# Altium PCB Receiver.PcbDoc
Units mm, origin at the board's own origin, x right, y up, seen from the top; angles counter-clockwise.
Board outline 64.8 x 68.17 mm, 2 copper layers (Top Layer, Bottom Layer); 36 components, 18 nets, 93 pads, 163 vias.
Unrouted connection lines stored in the file: 18.
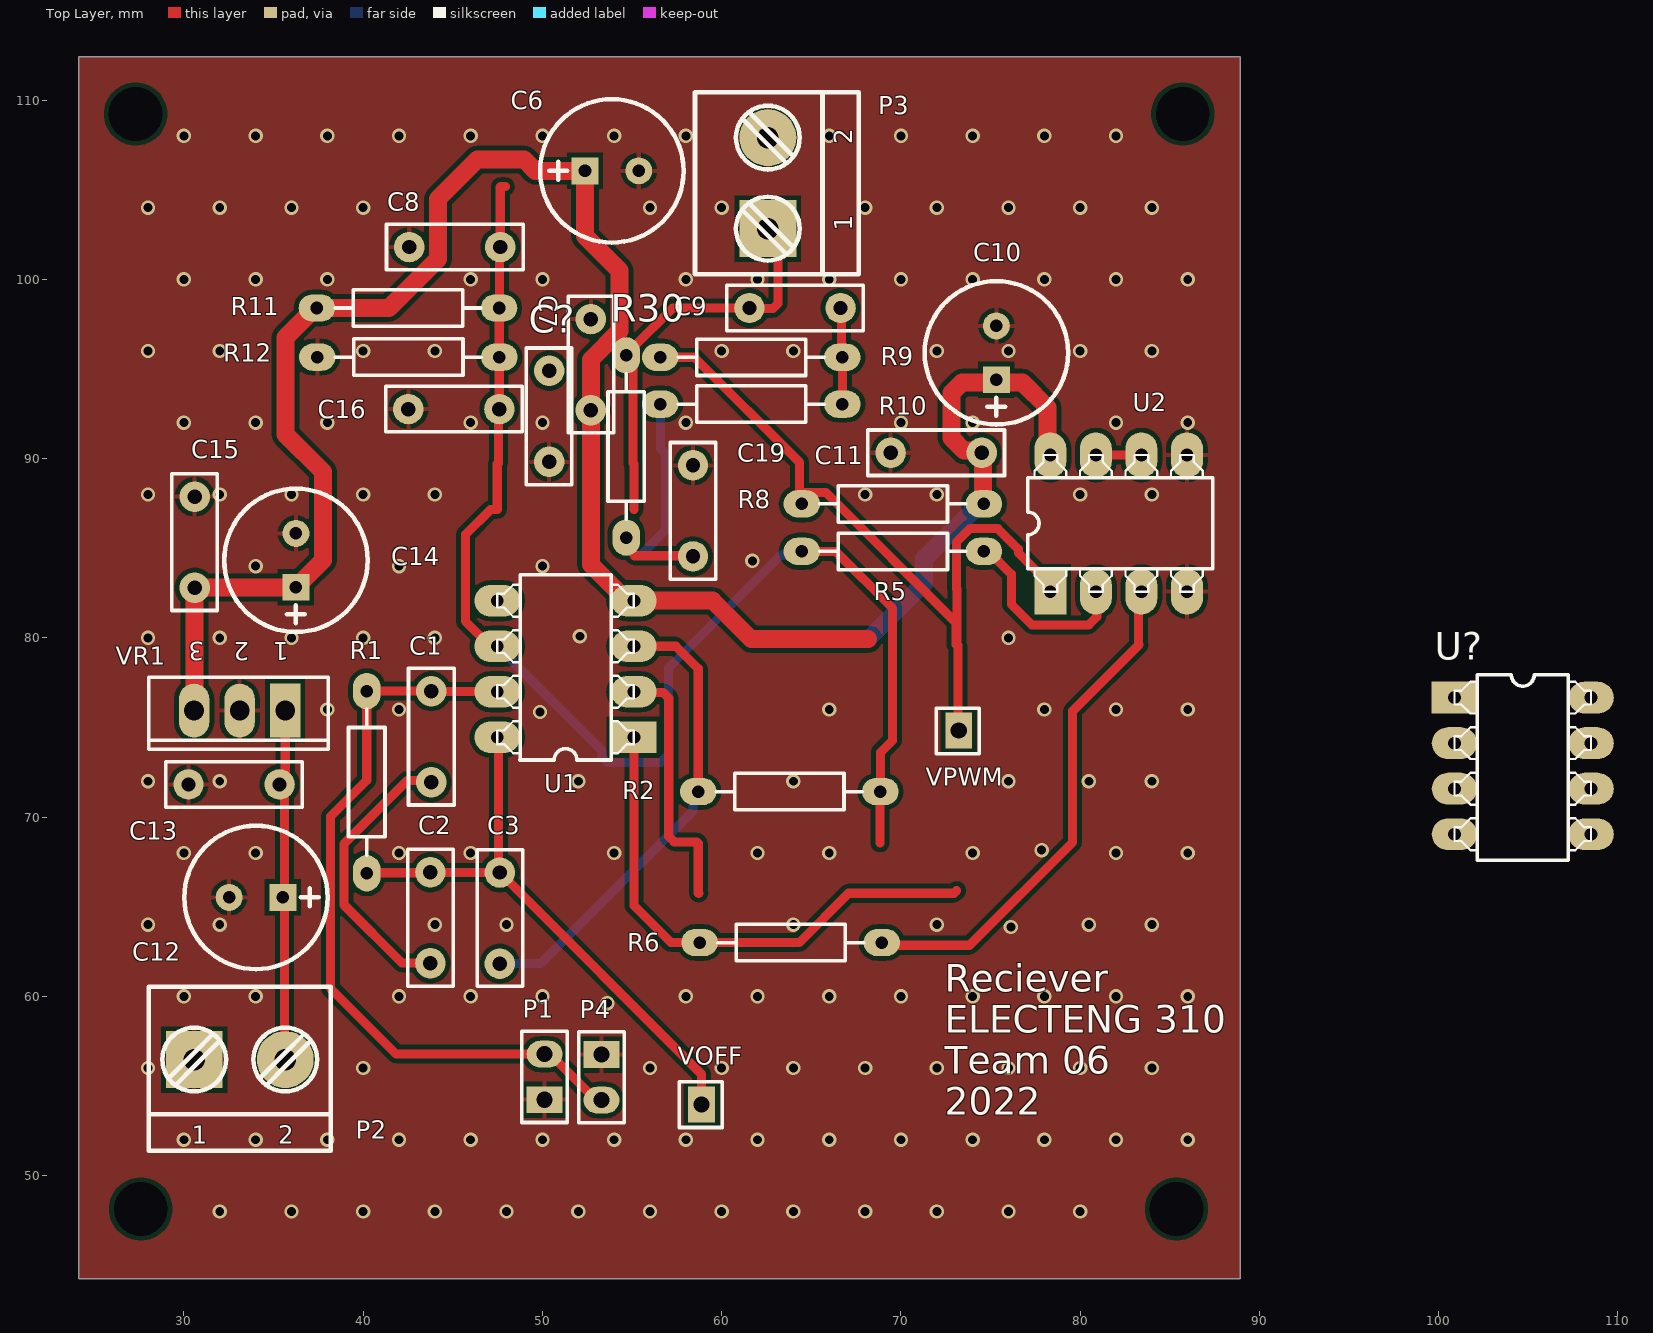
[diagram p0: Top Layer view]
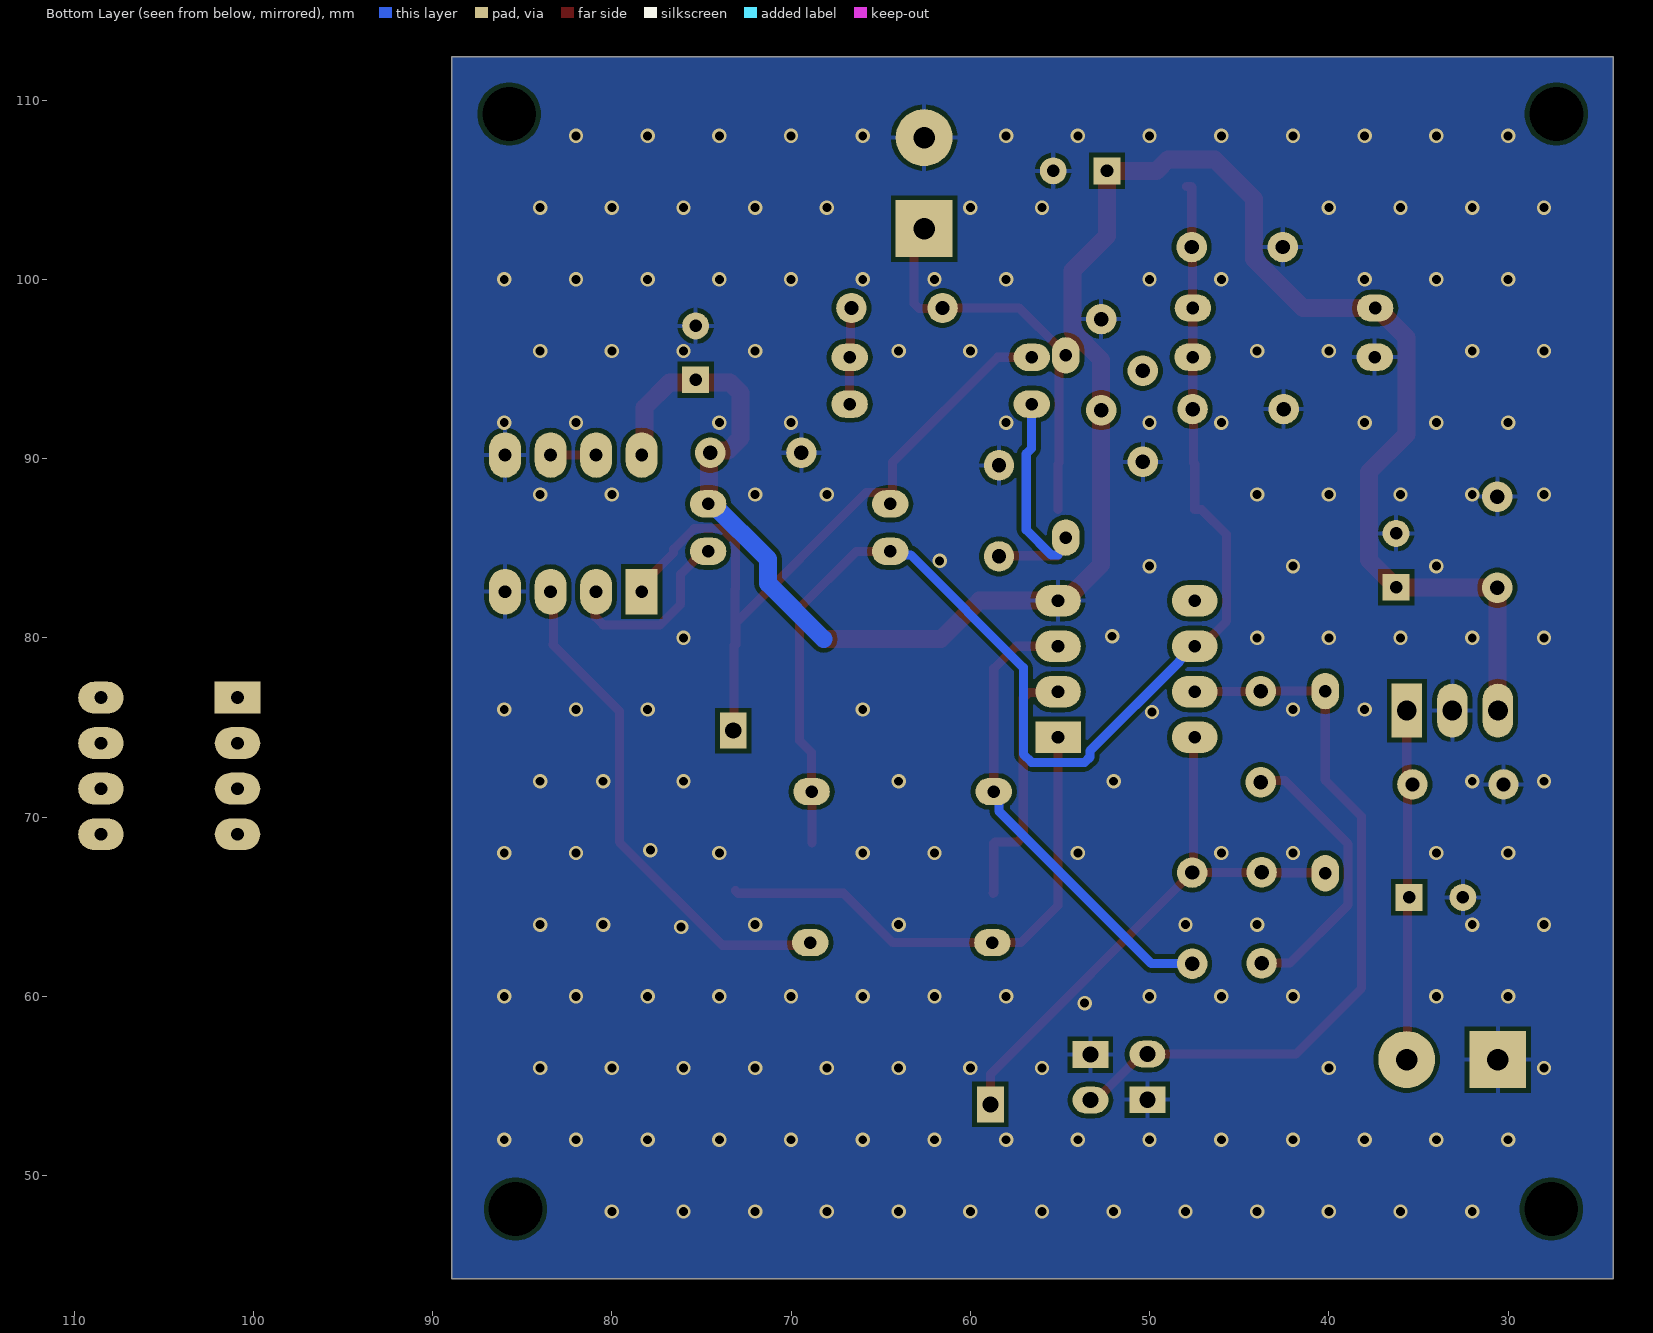
[diagram p1: Bottom Layer view, seen from below]

## Layer stack, top to bottom
Top Solder: solder mask 0.0102, Solder Resist, Dk 3.5
Top Layer: signal copper 0.0356
Dielectric 1: dielectric 0.32, FR-4, Dk 4.8
Bottom Layer: signal copper 0.0356
Bottom Solder: solder mask 0.0102, Solder Resist, Dk 3.5

## Board outline
24.125,44.25 24.125,112.425 88.925,112.425 88.925,44.25

## Design rules (kind name [scope] priority, off if disabled: settings)
Clearance [All] p1: gap=0.254 ignorepadtopadclearanceinfootprint=FALSE except(0: Arc-Hole Track-Hole SMDPad-Hole THPad-Hole Via-Hole Fill-Hole Poly-Hole Region-Hole Text-Hole)
MinimumSolderMaskSliver [All] p1: minsoldermaskwidth=0.1
PolygonConnect [All] p1: thpad.connectstyle=Relief thpad.reliefconductorwidth=0.254 thpad.reliefentries=4 thpad.polygonreliefangle="90 Angle" thpad.airgapwidth=0.254 smdpad.connectstyle=Relief smdpad.reliefconductorwidth=0.254 smdpad.reliefentries=4 smdpad.polygonreliefangle="90 Angle" smdpad.airgapwidth=0.254 via.connectstyle=Direct via.reliefconductorwidth=0.254 via.reliefentries=4 via.polygonreliefangle="90 Angle" via.airgapwidth=0.254
RoomDefinition Regulator [InComponentClass('Regulator')] p1: confinementstyle=ConfineIn formatcopy=TRUE lockcomponents=FALSE outline 0,0 50.8,0 50.8,25.4 0,25.4
RoomDefinition "Light Detector" [InComponentClass('Light Detector')] p2: confinementstyle=ConfineIn formatcopy=TRUE lockcomponents=FALSE outline 0,0 50.8,0 50.8,25.4 0,25.4
RoomDefinition "PWM Regenerator" [InComponentClass('PWM Regenerator')] p3: confinementstyle=ConfineIn formatcopy=TRUE lockcomponents=FALSE outline 0,0 50.8,0 50.8,25.4 0,25.4
RoomDefinition "LP Filter" [InComponentClass('LP Filter')] p4: confinementstyle=ConfineIn formatcopy=TRUE lockcomponents=FALSE outline 0,0 50.8,0 50.8,25.4 0,25.4
RoomDefinition "HP Filter" [InComponentClass('HP Filter')] p5: confinementstyle=ConfineIn formatcopy=TRUE lockcomponents=FALSE outline 0,0 50.8,0 50.8,25.4 0,25.4
RoutingVias [All] p1: holewidth=0.711 width=1.27 viastyle="Through Hole" minholewidth=0.711 minwidth=1.27 maxholewidth=0.711 maxwidth=1.27
SilkToSilkClearance [All] p1: silktosilkclearance=0.1
SilkToSolderMaskClearance [IsPad] p1: minsilkscreentomaskgap=0.1 clearancetoexposedcopper=TRUE
SolderMaskExpansion [All] p1: expansion=0.102 istentingtop=FALSE
Width [All] p1: maxlimit=1.016 minlimit=0.254 preferedwidth=0.508
27 further rules are at their usual default settings.

## Classes and differential pairs
component class "LP Filter": C9 C10 C11 C19 C? P3 R9 R10 R30 U?
component class Regulator: C12 C13 C14 C15 C16 C? J? P2 R11 R12 VR1
component class "PWM Regenerator": C6 C7 C8 C? J? R5 R6 R8 U2 VPWM
component class "Light Detector": C1 C2 C? J? P1 P4 R1 tm U1 VOFF
component class "HP Filter": C3 C? R2

## Components (designator, comment, footprint, x,y, rotation, side; value= is the part's Value field where it differs from the comment)
C1 "15p" ece-RAD0.2 43.8,77.025 r270 top
C2 "15p" ece-RAD0.2 43.75,61.845 r90 top
C3 "27n" ece-RAD0.2 47.625,66.905 r270 top
C6 "10uF" ece-CAPAD2TH0.3 52.375,106.05 r0 top
C7 "100 nF" ece-RAD0.2 52.7,92.7 r90 top
C8 "100 nF" ece-RAD0.2 47.65,101.8 r180 top
C9 "10 nF" ece-RAD0.2 66.63,98.4 r180 top
C10 "10uF" ece-CAPAD2TH0.3 75.325,94.4 r90 top
C11 "100 nF" ece-RAD0.2 74.505,90.325 r180 top
C12 "22uF" ece-CAPAD2TH0.3 35.521,65.518 r180 top
C13 "330 nF" ece-RAD0.2 35.336,71.822 r180 top
C14 "10uF" ece-CAPAD2TH0.3 36.25,82.825 r90 top
C15 "100 nF" ece-RAD0.2 30.6,82.795 r90 top
C16 "100 nF" ece-RAD0.2 47.599,92.76 r180 top
C19 "100 nF" ece-RAD0.2 58.4,84.545 r90 top
C? "10 nF" ece-RAD0.2 50.375,94.9 r270 top
P1 "Header 2" ece-HDR1X2 50.125,54.235 r90 top
P2 "Connector2way" ece-TER-2.02 30.575,56.475 r90 top
P3 "Connector2way" ece-TER-2.02 62.575,102.825 r180 top
P4 "Header 2" ece-HDR1X2 53.298,56.752 r270 top
R1 "100k" ece-AXIAL0.4 40.2,71.95 r270 top
R2 "10k" ece-AXIAL0.4 63.775,71.425 r180 top
R5 "1k" ece-AXIAL0.4 69.55,84.825 r0 top
R6 "1k" ece-AXIAL0.4 63.85,63 r0 top
R8 "1k" ece-AXIAL0.4 69.55,87.475 r0 top
R9 "100k" ece-AXIAL0.4 61.65,95.65 r0 top
R10 "10k" ece-AXIAL0.4 61.652,93.038 r180 top
R11 "10k" ece-AXIAL0.4 42.5,98.4 r180 top
R12 "10k" ece-AXIAL0.4 42.521,95.66 r0 top
R30 "4.7k" ece-AXIAL0.4 54.675,90.675 r90 top
U1 "TLC082" ECE-DIP8 55.102,74.452 r180 top
U2 "LM393AN" ECE-DIP8 78.335,82.575 r90 top
U? "TLC082" ECE-DIP8 100.88,76.665 r0 top
VOFF "Vdet" ece-HDR1 58.875,53.975 r0 top
VPWM "VPWM" ece-HDR1 73.225,74.825 r0 top
VR1 "*" ece-TO220 37.048,77.793 r180 top

## Footprints (in the part's own frame and the unit in brackets; to place one, negate y for a bottom-side part, rotate by r counter-clockwise, add the part's x,y. Pads: shape width x height; smd on the part's side, far side on the other; paste and mask are expansions set on the pad)
ece-AXIAL0.4 [mil]
  oval 80x60 hole 27.56: 1(-200,0) 2(200,0)
  silkscreen extent -160,-40 160,40
ece-CAPAD2TH0.3 [mm]
  rect 1.5x1.5 hole 0.7: 1(0,0)
  round 1.5 hole 0.7: 2(3,0)
  silkscreen extent -2.5,-4 5.5,4
ECE-DIP8 [mil]
  rect 100x70 hole 28: 1(0,0)
  oval 100x70 hole 28: 2(0,-100) 3(0,-200) 4(0,-300) 5(300,-300) 6(300,-200) 7(300,-100) 8(300,0)
  silkscreen extent 0,-357 300,50
ece-HDR1 [mm]
  rect 1.5x2 hole 0.9: 1(0,0)
  silkscreen extent -1.25,-1.29 1.15,1.25
ece-HDR1X2 [mm] "Header 2 way"
  rect 1.5x2 hole 0.9: 1(0,0)
  oval 1.5x2 hole 0.9: 2(2.54,0)
  silkscreen extent -1.27,-1.27 3.81,1.27
ece-RAD0.2 [mm]
  round 1.7 hole 0.8: 1(0,0) 2(5.08,0)
  silkscreen extent -1.27,-1.27 6.35,1.27
ece-TER-2.02 [mm]
  rect 3.175x3.175 hole 1.2: 1(0,0)
  round 3.175 hole 1.2: 2(0,-5.08)
  silkscreen extent -5.08,-7.62 4.06,2.54
ece-TO220 [mm]
  rect 1.7x3 hole 1.1: 1(1.4,1.85)
  oval 1.7x3 hole 1.1: 2(3.94,1.85) 3(6.48,1.85)
  silkscreen extent -1,0 9,4

## Part data
C1 C2 C3 C7 C8 C9 C11 C13 C15 C16 C19 C?: library part CAP, "Capacitor Non Polarised Through Hole"
C6 C10 C12 C14: library part "CAP 22uF TH", "Polarized Capacitor (Radial)", Manufacturer="Generic Components", Class I=Passive, Class II=Capacitor, Published=8-Jun-2000, Publisher="Altium Limited", Revision="July-2002: Re-released for DXP Platform."
P1 P4: "Header, 2-Pin", LatestRevisionDate=17-Jul-2002, LatestRevisionNote="Re-released for DXP Platform.", Publisher="Altium Limited"
P2 P3: "2 way screw connector"
R1 R2 R5 R6 R8 R9 R10 R11 R12 R30: library part Res1, "Resistor", LatestRevisionDate=17-Jul-2002, LatestRevisionNote="Re-released for DXP Platform.", PackageReference=AXIAL-0.3, Published=8-Jun-2000, Publisher="Altium Limited"
U2: "Dual Comparator", ComponentLink1Description="Manufacturer Link", ComponentLink1URL=http://www.onsemi.com/site/products/taxonomy/0,4438,133,00.html, DatasheetVersion=1988, LatestRevisionDate=06-Jun-2005, LatestRevisionNote="Stylized 3D Model Added.", PackageDescription="DIP; 8 Leads; Row Spacing 7.62 mm; Pitch 2.54 mm", PackageReference=626-05, Published=17-Jul-2002, Publisher="Altium Limited"
VOFF VPWM: library part "Test pin", "Socket", LatestRevisionDate=17-Jul-2002, LatestRevisionNote="Re-released for DXP Platform.", Publisher="Altium Limited"
VR1: library part VoltRegBig, "Voltage Regulator"

## Free pads (board coordinates)
  round 0 hole 3 unplated mask+0: 2(27.59,48.14) 3(85.375,48.14) 4(85.725,109.22) 5(27.305,109.22)

## Via types
v1: diameter 0.8, hole 0.5, Top Layer to Bottom Layer, 163 vias

## Nets (pads, with @x,y where several pads share a name; then routed paths per layer and width w, separated by ;. In a path a pad name is that pad's centre, name@x,y a point inside that pad or via, vN(x,y) a via of type N, cw(c..) or ccw(c..) an arc to the next point about the centre after c; other vN are vias at no path point)
GND: C6.2 C7.2 C8.2 C10.2 C11.2 C12.2 C13.2 C14.2 C15.2 C16.2 C19.2 C?.2 P1.1 P2.1 P3.2 P4.1 R12.1 U1.4 U2.4 U2.5 U?.4 VR1.2
  other v1: 32,48 36,48 40,48 44,48 48,48 52,48 56,48 60,48 64,48 68,48 72,48 76,48 80,48 30,52 34,52 38,52 42,52 46,52 50,52 54,52 58,52 62,52 66,52 70,52 74,52 78,52 82,52 86,52 28,56 40,56 56,56 60,56 64,56 68,56 72,56 76,56 80,56 84,56 53.623,59.623 30,60 34,60 42,60 46,60 50,60 58,60 62,60 66,60 70,60 74,60 78,60 82,60 86,60 76.13,63.87 28,64 32,64 44,64 48,64 64,64 72,64 80.483,64 84,64 30,68 34,68 42,68 46,68 54,68 62,68 66,68 74,68 82,68 86,68 77.845,68.155 28,72 32,72 52,72 64,72 76,72 80.483,72 84,72 49.865,75.865 38,76 42,76 66,76 78,76 82,76 86,76 28,80 32,80 36,80 40,80 44,80 76,80 52.089,80.089 34,84 42,84 50,84 61.708,84.292 28,88 32,88 36,88 40,88 44,88 68,88 72,88 80,88 84,88 30,92 34,92 38,92 46,92 50,92 58,92 70,92 74,92 82,92 86,92 28,96 32,96 40,96 44,96 60,96 64,96 72,96 76,96 80,96 84,96 30,100 34,100 38,100 46,100 50,100 58,100 62,100 66,100 70,100 74,100 78,100 82,100 86,100 28,104 32,104 36,104 40,104 56,104 60,104 68,104 72,104 76,104 80,104 84,104 30,108 34,108 38,108 42,108 46,108 50,108 54,108 58,108 66,108 70,108 74,108 78,108 82,108
NetC1_1: C1.1 P1.2 P4.2 R1.1 U1.2 | length 56.8
  Top Layer w0.508: 47.482,76.992 47.466,77.008 43.816,77.008 C1.1 43.797,77.027 40.203,77.027 R1.1 40.2,72.056 38.168,70.024 38.168,60.457 41.85,56.775 P1.2 50.43,56.775 52.993,54.212 P4.2 ; U1.2 55.152,76.942 56.752,76.942 57.05,76.645 57.05,68.918 57.348,68.621 58.599,68.621 58.695,68.525 58.695,65.775 58.72,65.75
NetC1_2: C1.2 C2.1 | length 16
  Top Layer w0.508: C2.1 43.745,61.85 42.175,61.85 38.93,65.095 38.93,68.505 42.475,72.05 43.695,72.05 C1.2
NetC2_2: C2.2 C3.1 R1.2 U1.1 VOFF.1 | length 32.6
  Top Layer w0.508: R1.2 40.228,66.898 43.723,66.898 C2.2 43.76,66.915 C3.1@47.615,66.915 ; 47.482,74.452 47.554,74.381 47.554,66.976 C3.1@47.615,66.915 ; VOFF.1 58.875,55.655 C3.1@47.615,66.915
NetC3_2: C3.2 R2.2 R6.1 | length 26.6
  Top Layer w0.508: 54.721,79.532 55.102,79.532 57.443,79.532 58.695,78.28 R2.2@58.695,71.65
  Bottom Layer w0.508: C3.2 49.895,61.825 58.398,70.328 58.398,71.128 R2.2
NetC9_1: C9.1 R9.2 R10.1 | length 5.6
  Top Layer w0.508: C9.1 66.68,98.35 66.68,95.7 R9.2 66.742,95.637 66.742,92.912 R10.1@66.755,92.9
NetC9_2: C9.2 P3.1 U?.6 U?.7 | length 22.7
  Top Layer w0.508: 55.102,87.152 55.102,89.692 55.046,89.748 55.046,96.176 57.27,98.4 C9.2 61.589,98.361 62.852,98.361 63.15,98.659 63.15,102.25 P3.1 ; P3.1@61.55,102.825 P3.1@61.575,102.85
NetC16_1: C16.1 R11.1 R12.2 | length 75.3
  Top Layer w0.508: 47.482,79.532 47.101,79.532 45.704,80.929 45.704,85.755 47.101,87.152 47.482,87.152 47.482,89.692 47.541,89.75 47.541,92.702 C16.1 47.59,92.77 47.59,98.39 R11.1 47.615,98.435 47.615,101.765 47.65,101.8 47.65,105.15 47.675,105.175 47.925,105.175 ; 64.47,84.825 66.35,84.825 69.533,81.642 69.533,74.282 68.863,73.612 68.863,71.433 68.855,71.425 68.842,71.412 68.842,68.562 68.83,68.55
  Bottom Layer w0.508: 47.482,79.532 47.519,79.532 48.332,78.719 48.332,78.682 53.324,73.69 53.324,73.353 53.622,73.055 56.583,73.055 57.042,73.514 57.042,78.342 63.331,84.631 64.276,84.631 64.47,84.825
NetC19_1: C19.1 R10.2 U?.5 | length 12.7
  Top Layer w0.508: 55.102,84.612 55.136,84.578 58.366,84.578 C19.1
  Bottom Layer w0.508: 55.102,84.612 55.469,84.612 56.88,86.023 56.88,90.271 56.595,90.556 R10.2@56.595,92.9
NetC?_1: C?.1 R9.1 R30.2
NetR5_2: R5.2 U2.2 | length 10.6
  Top Layer w0.508: R5.2 74.884,84.825 76.157,83.552 76.157,81.876 77.308,80.725 80.475,80.725 80.925,81.175 80.925,82.525 U2.2
NetR6_2: R6.2 U2.3 | length 28.6
  Top Layer w0.508: R6.2 69.08,62.85 73.825,62.85 79.575,68.6 79.575,75.92 83.28,79.625 83.247,79.658 83.247,82.543 U2.3@83.215,82.575
NetR8_1: R8.1 U2.1 VPWM.1 | length 42.7
  Top Layer w0.508: 56.57,95.65 58.475,95.65 64.345,89.78 64.345,88.125 64.37,88.1 65.825,88.1 73.074,80.851 73.074,79.625 ; VPWM.1 73.173,74.877 73.173,79.573 73.12,79.625 73.12,82.716 73.106,82.73 73.106,85.351 73.85,86.095 75.41,86.095 76.555,84.95 76.555,84.736 78.335,82.956 U2.1
NetR30_1: R30.1
NetU2_6: U2.6 U2.7 | length 2.5
  Top Layer w0.508: U2.7 U2.6
Vbatt: C12.1 C13.1 P2.2 VR1.1 | length 19.5
  Top Layer w0.508: VR1.1 35.655,75.936 35.655,71.675 35.615,71.635 35.615,65.34 35.575,65.3 35.615,65.26 35.615,56.515 P2.2
VCC: C6.1 C7.1 C10.1 C11.1 C14.1 C15.1 R8.2 R11.2 U1.8 U2.8 U?.8 VR1.3 | length 118.4
  Top Layer w1: VR1.3 30.584,75.959 30.584,82.779 C15.1 30.615,82.81 36.235,82.81 C14.1 37.754,84.329 37.754,89.267 35.671,91.35 35.671,96.763 37.308,98.4 R11.2 41.438,98.4 44.174,101.136 44.174,104.49 46.363,106.679 48.987,106.679 49.616,106.05 C6.1 52.375,102.422 54.304,100.493 54.304,97.116 52.7,95.512 C7.1 52.7,84.093 54.721,82.072 55.102,82.072 59.503,82.072 61.65,79.925 68.175,79.925 ; C11.1 74.371,90.459 73.506,90.459 72.825,91.14 72.825,93.657 73.411,94.243 75.168,94.243 C10.1 75.486,94.239 76.786,94.239 78.186,92.839 78.186,90.344 U2.8 ; C11.1@74.567,90.263 74.567,87.538 R8.2
  Bottom Layer w1: 68.175,79.925 71.292,83.042 71.292,84.391 74.376,87.475 R8.2
VCC/2: C8.1 R2.1 R5.1 U1.3
pads on no net: U1.5 U1.6 U1.7 U?.1 U?.2 U?.3
copper on no net: | length 29.4
  Top Layer w0.508: 55.102,74.452 55.102,65.073 57.175,63 58.77,63 64.325,63 67.075,65.75 68.88,65.75 72.951,65.75 73.104,65.903

## Polygon pours and split planes (outlines as drawn)
GND on Bottom Layer "GND_L02_P000" (solid, pour order 0): 24.15,112.395 24.15,44.25 88.9,44.25 88.9,112.395
GND on Top Layer "GND_L01_P001" (solid, pour order 1): 24.1,112.45 24.1,44.225 24.15,44.275 88.925,44.275 88.925,112.375 88.95,112.4

## Silkscreen, mask and mechanical layers (free items; w line width, h text height)
Top Overlay:
  text "Reciever / ELECTENG 310 / Team 06 / 2022" at 72.432,53.4 h1.52
Mechanical 1:
  the board outline again, w0.254

## Text inside footprints (layer, text, board x,y; h text height)
P2: Top Overlay "2" at 35.274,51.776 h1; Top Overlay "1" at 30.448,51.776 h1
P3: Top Overlay "1" at 67.274,102.698 h1 r90; Top Overlay "2" at 67.274,107.524 h1 r90
VR1: Top Overlay "1" at 35.848,79.743 h1 r180; Top Overlay "2" at 33.648,79.743 h1 r180; Top Overlay "3" at 31.148,79.743 h1 r180